# EAGLE board mega_classboard2.1 (EAGLE 6.5.0)
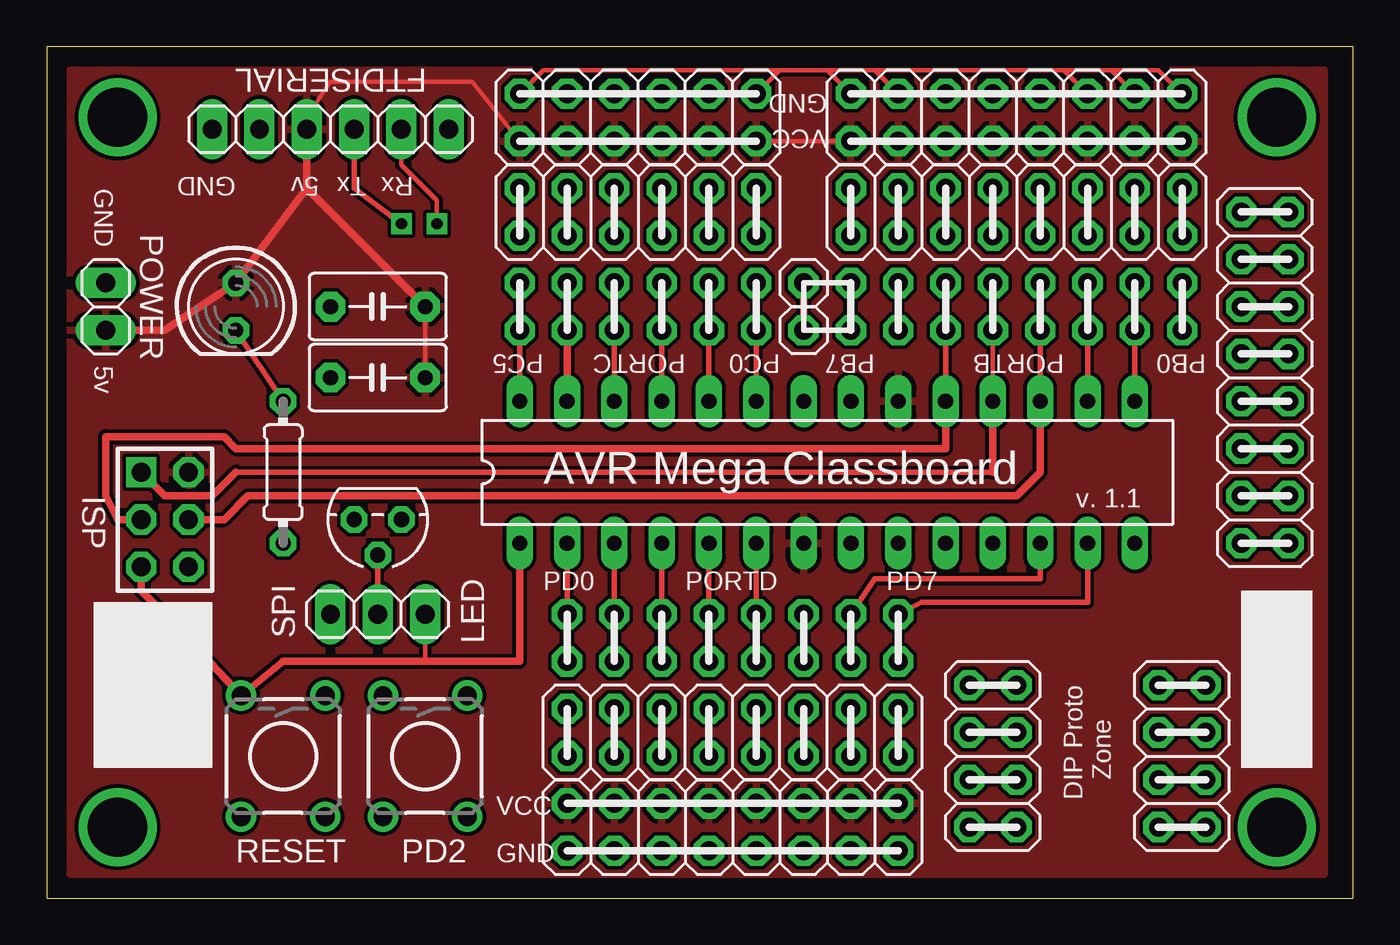
[diagram p0: board, top side]
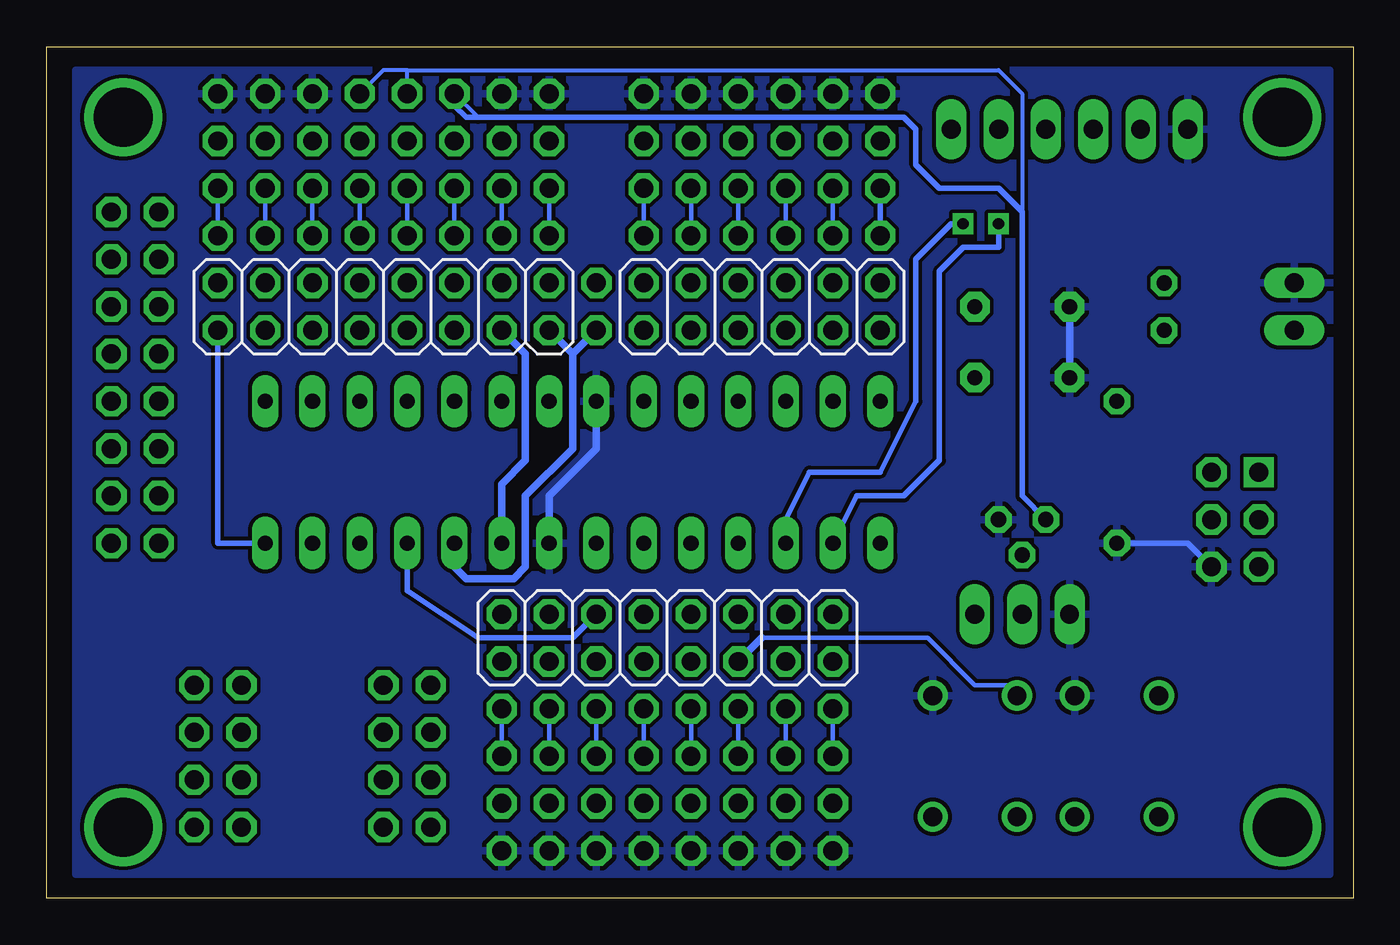
[diagram p1: board, bottom side, seen from below]

Size 70.16 x 45.71 mm. Coordinates in mm from the lower left corner, seen from the top.
Outline: 0,0 70.16,0 70.16,45.71 0,45.71 0,0
Copper layers (1*16): Top 0.035mm / dielectric 1.5mm / Bottom 0.035mm
Design rules "SparkFun": minimum track width 8mil, minimum drill 20mil, track to track 8mil, track to pad 8mil, pad to pad 8mil, via to via 8mil, smd to smd 8mil, copper to edge 10mil, drill to drill 8mil, minimum pad ring 12mil, minimum via ring 10mil, stop-mask expansion 4mil, vias tented up to drill 25mil, thermal gap 10mil

## Footprints (pad centres in the part's own frame; a part is rotated, then mirrored left to right if it is on the bottom)
TACTILE-PTH = drill 1.016: 1 -3.251,2.261; 2 3.251,2.261; 3 -3.251,-2.261; 4 3.251,-2.261
C5B3.5 = drill 0.813 pad 1.6 octagon: 1 -2.54,0; 2 2.54,0
1X06 = drill 1.016 long: 1 -6.35,0; 2 -3.81,0; 3 -1.27,0; 4 1.27,0; 5 3.81,0; 6 6.35,0
PAD_0.1250 = drill 3.175 pad 3.175: 1 0,0
DIL28-3 = drill 0.813 long: 1 -16.51,-3.81; 2 -13.97,-3.81; 3 -11.43,-3.81; 4 -8.89,-3.81; 5 -6.35,-3.81; 6 -3.81,-3.81; 7 -1.27,-3.81; 8 1.27,-3.81; 9 3.81,-3.81; 10 6.35,-3.81; 11 8.89,-3.81; 12 11.43,-3.81; 13 13.97,-3.81; 14 16.51,-3.81; 15 16.51,3.81; 16 13.97,3.81; 17 11.43,3.81; 18 8.89,3.81; 19 6.35,3.81; 20 3.81,3.81; 21 1.27,3.81; 22 -1.27,3.81; 23 -3.81,3.81; 24 -6.35,3.81; 25 -8.89,3.81; 26 -11.43,3.81; 27 -13.97,3.81; 28 -16.51,3.81
AVR-ISP-6 = drill 1.016 square: 1 -2.54,-1.27 | drill 1.016 octagon: 2 -2.54,1.27; 3 0,-1.27; 4 0,1.27; 5 2.54,-1.27; 6 2.54,1.27
2X04 = drill 1.016 octagon: 1 -3.81,-1.27; 2 -3.81,1.27; 3 -1.27,-1.27; 4 -1.27,1.27; 5 1.27,-1.27; 6 1.27,1.27; 7 3.81,-1.27; 8 3.81,1.27
2X08 = drill 1.016 octagon: 1 -8.89,-1.27; 2 -8.89,1.27; 3 -6.35,-1.27; 4 -6.35,1.27; 5 -3.81,-1.27; 6 -3.81,1.27; 7 -1.27,-1.27; 8 -1.27,1.27; 9 1.27,-1.27; 10 1.27,1.27; 11 3.81,-1.27; 12 3.81,1.27; 13 6.35,-1.27; 14 6.35,1.27; 15 8.89,-1.27; 16 8.89,1.27
2X06 = drill 1.016 octagon: 1 -6.35,-1.27; 2 -6.35,1.27; 3 -3.81,-1.27; 4 -3.81,1.27; 5 -1.27,-1.27; 6 -1.27,1.27; 7 1.27,-1.27; 8 1.27,1.27; 9 3.81,-1.27; 10 3.81,1.27; 11 6.35,-1.27; 12 6.35,1.27
1X01 = drill 1.016 octagon: 1 0,0
1X02 = drill 1.016 long: 1 -1.27,0; 2 1.27,0
LED5MM = drill 0.813 octagon: A -1.27,0; K 1.27,0
TO-92 = drill 0.813 octagon: 1 -1.27,0; 2 0,1.905; 3 1.27,0
0204/7 = drill 0.813 octagon: 1 -3.81,0; 2 3.81,0
1X03 = drill 1.016 long: 1 -2.54,0; 2 0,0; 3 2.54,0

## Placement (x,y rotation side)
A  SWITCH-MOMENTARY-2PTH  [TACTILE-PTH]  12.7,7.62 270 top
B  SWITCH-MOMENTARY-2PTH  [TACTILE-PTH]  20.32,7.62 270 top
BUFFER  1u  [C5B3.5]  17.78,27.94 180 top
BUFFER1  0.1u  [C5B3.5]  17.78,31.75 180 top
FTDISERIAL  [1X06]  15.24,41.27 0 top
H1  SPECIAL_DRILL_0.1250  [PAD_0.1250]  3.81,41.91 0 top
H2  SPECIAL_DRILL_0.1250  [PAD_0.1250]  3.81,3.81 0 top
H3  SPECIAL_DRILL_0.1250  [PAD_0.1250]  66.04,41.91 0 top
H4  SPECIAL_DRILL_0.1250  [PAD_0.1250]  66.04,3.81 0 top
IC1  MEGA8-P  [DIL28-3]  41.91,22.86 0 top
ISP  AVR-ISP-6  [AVR-ISP-6]  6.35,20.32 270 top
JP1  [2X04]  50.8,7.62 90 top
JP2  [2X04]  60.96,7.62 90 top
JP3  [2X08]  52.07,36.83 0 top
JP4  [2X08]  36.83,8.89 180 top
JP5  [2X08]  65.41,27.94 90 top
JP6  [2X06]  31.75,36.83 0 top
JP8  [2X08]  52.07,41.91 180 top
JP9  [2X08]  36.83,3.81 0 top
JP10  [2X06]  31.75,41.91 180 top
JP11  [1X01]  40.64,30.48 0 top
JP12  [1X01]  40.64,33.02 0 top
PORTB  [2X08]  52.07,31.75 0 bottom
PORTC  [2X06]  31.75,31.75 0 bottom
PORTD  [2X08]  36.83,13.97 180 bottom
POWER  [1X02]  3.18,31.75 90 top
POWERLED  [LED5MM]  10.16,31.75 270 top
Q1  2N7000  [TO-92]  17.78,20.32 180 top
R1  200  [0204/7]  12.7,22.86 90 top
SWITCHABLEGND  [1X03]  17.78,15.24 180 top

## Library data of the parts
A B = SparkFun
BUFFER BUFFER1 = capacitor-wima
FTDISERIAL JP1-JP6 JP8-JP12 PORTB PORTC PORTD POWER SWITCHABLEGND = pinhead
H1-H4 = special-drill
IC1 = atmel; OC_FARNELL: unknown; OC_NEWARK: unknown
ISP = atmel-1
POWERLED = led
Q1 = transistors
R1 = rcl

## Nets
GND: A.1 B.1 BUFFER1.2 BUFFER.2 FTDISERIAL.1 IC1.8 IC1.22 ISP.6 JP8.1 JP8.3 JP8.5 JP8.13 JP8.15 JP9.1 JP9.3 JP9.5 JP9.7 JP9.9 JP9.11 JP9.13 JP9.15 JP10.1 JP10.3 JP10.5 JP10.7 JP10.9 JP10.11 POWER.2 Q1.1 R1.1 SWITCHABLEGND.3
N$1: POWERLED.K R1.2
N$2: Q1.2 SWITCHABLEGND.2
N$3: JP6.11 JP6.12
N$4: JP6.9 JP6.10
N$5: JP6.7 JP6.8
N$6: JP6.5 JP6.6
N$7: JP6.3 JP6.4
N$8: JP6.1 JP6.2
N$9: JP3.15 JP3.16
N$10: JP3.13 JP3.14
N$11: JP3.11 JP3.12
N$12: JP3.9 JP3.10
N$13: JP3.7 JP3.8
N$14: JP3.5 JP3.6
N$15: JP3.3 JP3.4
N$16: JP3.1 JP3.2
N$17: JP4.15 JP4.16
N$18: JP4.13 JP4.14
N$19: JP4.11 JP4.12
N$20: JP4.9 JP4.10
N$21: JP4.7 JP4.8
N$22: JP4.5 JP4.6
N$23: JP4.3 JP4.4
N$24: JP4.1 JP4.2
N$25: JP1.1 JP1.2
N$26: JP1.3 JP1.4
N$27: JP1.5 JP1.6
N$28: JP1.7 JP1.8
N$29: JP2.1 JP2.2
N$30: JP2.3 JP2.4
N$31: JP2.5 JP2.6
N$32: JP2.7 JP2.8
N$33: JP5.1 JP5.2
N$34: JP5.3 JP5.4
N$35: JP5.5 JP5.6
N$36: JP5.7 JP5.8
N$37: JP5.9 JP5.10
N$38: JP5.11 JP5.12
N$39: JP5.13 JP5.14
N$40: JP5.15 JP5.16
N$41: JP8.7 JP8.9 JP8.11 Q1.3
N$46: A.3 IC1.1 ISP.5 SWITCHABLEGND.1
PORTB0: IC1.14 PORTB.1 PORTB.2
PORTB1: IC1.15 PORTB.3 PORTB.4
PORTB2: IC1.16 PORTB.5 PORTB.6
PORTB3: IC1.17 ISP.4 PORTB.7 PORTB.8
PORTB4: IC1.18 ISP.1 PORTB.9 PORTB.10
PORTB5: IC1.19 ISP.3 PORTB.11 PORTB.12
PORTB6: IC1.9 PORTB.13 PORTB.14
PORTB7: IC1.10 JP11.1 JP12.1 PORTB.15 PORTB.16
PORTC0: IC1.23 PORTC.1 PORTC.2
PORTC1: IC1.24 PORTC.3 PORTC.4
PORTC2: IC1.25 PORTC.5 PORTC.6
PORTC3: IC1.26 PORTC.7 PORTC.8
PORTC4: IC1.27 PORTC.9 PORTC.10
PORTC5: IC1.28 PORTC.11 PORTC.12
PORTD0: FTDISERIAL.4 IC1.2 PORTD.1 PORTD.2
PORTD1: FTDISERIAL.5 IC1.3 PORTD.3 PORTD.4
PORTD2: B.3 IC1.4 PORTD.5 PORTD.6
PORTD3: IC1.5 PORTD.7 PORTD.8
PORTD4: IC1.6 PORTD.9 PORTD.10
PORTD5: IC1.11 PORTD.11 PORTD.12
PORTD6: IC1.12 PORTD.13 PORTD.14
PORTD7: IC1.13 PORTD.15 PORTD.16
VCC: BUFFER1.1 BUFFER.1 FTDISERIAL.3 IC1.7 IC1.20 ISP.2 JP8.2 JP8.4 JP8.6 JP8.8 JP8.10 JP8.12 JP8.14 JP8.16 JP9.2 JP9.4 JP9.6 JP9.8 JP9.10 JP9.12 JP9.14 JP9.16 JP10.2 JP10.4 JP10.6 JP10.8 JP10.10 JP10.12 POWER.1 POWERLED.A

## Tracks (layer width: path | path; a pad name or v marks a point on that pad's centre or on a via)
GND
  Top 0.254: JP10.3 JP10.5 JP10.7 JP10.9 JP10.11 26.67,44.45 39.37,44.45 | 39.37,44.45 JP10.1 | 39.37,44.45 41.91,44.45 | 41.91,44.45 JP8.15 | 44.45,44.45 JP8.13 | 41.91,44.45 44.45,44.45 | 54.61,44.45 JP8.5 | 44.45,44.45 54.61,44.45 | 57.15,44.45 JP8.3 | 54.61,44.45 57.15,44.45 | JP8.1 59.69,44.45 57.15,44.45
  Bottom 0.305: ISP.6 8.89,19.05 R1.1
  Bottom 0.406: IC1.8 43.18,21.59 40.64,24.13 IC1.22 | BUFFER.2 BUFFER1.2
  pour Bottom: 1.27,1.27 68.58,1.27 68.58,44.45 13.97,44.45 1.27,44.45
N$1
  Top 0.305: R1.2 POWERLED.K
N$2
  Top 0.305: SWITCHABLEGND.2 Q1.2
N$3
  Bottom 0.254: JP6.11 JP6.12
N$4
  Bottom 0.254: JP6.9 JP6.10
N$5
  Bottom 0.254: JP6.7 JP6.8
N$6
  Bottom 0.254: JP6.5 JP6.6
N$7
  Bottom 0.254: JP6.3 JP6.4
N$8
  Bottom 0.305: JP6.1 JP6.2
N$9
  Bottom 0.254: JP3.15 JP3.16
N$10
  Bottom 0.254: JP3.13 JP3.14
N$11
  Bottom 0.254: JP3.11 JP3.12
N$12
  Bottom 0.254: JP3.9 JP3.10
N$13
  Bottom 0.254: JP3.7 JP3.8
N$14
  Bottom 0.254: JP3.5 JP3.6
N$15
  Bottom 0.254: JP3.3 JP3.4
N$16
  Bottom 0.254: JP3.1 JP3.2
N$17
  Bottom 0.254: JP4.16 JP4.15
N$18
  Bottom 0.254: JP4.14 JP4.13
N$19
  Bottom 0.254: JP4.12 JP4.11
N$20
  Bottom 0.254: JP4.10 JP4.9
N$21
  Bottom 0.254: JP4.8 JP4.7
N$22
  Bottom 0.254: JP4.6 JP4.5
N$23
  Bottom 0.254: JP4.4 JP4.3
N$24
  Bottom 0.254: JP4.2 JP4.1
N$25
  Top 0.305: JP1.2 JP1.1
N$26
  Top 0.305: JP1.4 JP1.3
N$27
  Top 0.305: JP1.6 JP1.5
N$28
  Top 0.305: JP1.8 JP1.7
N$29
  Top 0.305: JP2.2 JP2.1
N$30
  Top 0.305: JP2.4 JP2.3
N$31
  Top 0.305: JP2.6 JP2.5
N$32
  Top 0.305: JP2.8 JP2.7
N$33
  Top 0.406: JP5.2 JP5.1
N$34
  Top 0.406: JP5.4 JP5.3
N$35
  Top 0.406: JP5.6 JP5.5
N$36
  Top 0.406: JP5.8 JP5.7
N$37
  Top 0.406: JP5.10 JP5.9
N$38
  Top 0.406: JP5.12 JP5.11
N$39
  Top 0.406: JP5.14 JP5.13
N$40
  Top 0.406: JP5.16 JP5.15
N$41
  Bottom 0.203: 46.99,41.91 JP8.11 | 17.78,36.83 17.78,43.18 19.05,44.45 50.8,44.45 | JP8.9 50.8,44.45 | JP8.7 52.07,44.45 50.8,44.45
  Bottom 0.305: 48.26,42.54 47.62,41.91 46.99,41.91 24.13,41.91 23.49,41.27 23.49,39.37 22.23,38.1 19.05,38.1 17.78,36.83 17.78,21.59 Q1.3
N$46
  Top 0.254: SWITCHABLEGND.1 20.32,12.7
  Top 0.406: ISP.5 5.08,16.51 6.35,15.24 A.3 12.7,12.7 20.32,12.7 25.4,12.7 IC1.1
PORTB0
  Top 0.254: PORTB.1 PORTB.2
  Bottom 0.305: IC1.14 60.96,19.05 PORTB.1
PORTB1
  Top 0.305: IC1.15 PORTB.3 PORTB.4
PORTB2
  Top 0.254: PORTB.5 PORTB.6
  Top 0.305: IC1.16 PORTB.5
PORTB3
  Top 0.254: PORTB.7 PORTB.8
  Top 0.305: IC1.17 PORTB.7
  Top 0.406: ISP.4 9.52,20.32 10.8,21.59 52.07,21.59 53.34,22.86 IC1.17
PORTB4
  Top 0.254: IC1.18 PORTB.9 PORTB.10
  Top 0.305: 10.16,22.86 50.8,22.86
  Top 0.406: 50.8,22.86 IC1.18 | 10.16,22.86 8.89,21.59 6.35,21.59 ISP.1
PORTB5
  Top 0.254: PORTB.11 PORTB.12
  Top 0.305: IC1.19 PORTB.11
  Top 0.406: ISP.3 3.81,20.32 3.18,21.59 3.18,24.77 9.52,24.77 10.16,24.13 48.26,24.13 IC1.19
PORTB6
  Top 0.254: PORTB.13 PORTB.14
  Bottom 0.406: PORTB.13 44.45,29.21 44.45,23.49 45.72,22.23 IC1.9
PORTB7
  Top 0.406: PORTB.15 PORTB.16 | JP11.1 JP12.1
  Bottom 0.406: 41.91,29.21 PORTB.15 | 41.91,29.21 41.91,24.13 44.45,21.59 44.45,17.78 45.09,17.14 47.62,17.14 48.26,17.78 IC1.10 | 41.91,29.21 JP11.1
PORTC0
  Top 0.254: PORTC.1 PORTC.2
  Top 0.305: IC1.23 PORTC.1
PORTC1
  Top 0.254: PORTC.3 PORTC.4
  Top 0.305: IC1.24 PORTC.3
PORTC2
  Top 0.254: PORTC.5 PORTC.6
  Top 0.305: IC1.25 PORTC.5
PORTC3
  Top 0.254: PORTC.7 PORTC.8
  Top 0.305: IC1.26 PORTC.7
PORTC4
  Top 0.254: PORTC.9 PORTC.10
  Top 0.406: IC1.27 PORTC.9
PORTC5
  Top 0.305: IC1.28 PORTC.11 PORTC.12
PORTD0  (via drill 0.6)
  Top 0.305: PORTD.1 IC1.2 | v19.05,36.2 16.51,38.1 FTDISERIAL.4
  Top 0.406: PORTD.2 PORTD.1
  Bottom 0.305: IC1.2 26.67,21.59 24.13,21.59 22.23,23.49 22.23,33.66 20.95,34.92 19.05,34.92 v19.05,36.2
PORTD1  (via drill 0.6)
  Top 0.254: v20.95,36.2 20.95,37.46 19.05,39.37 FTDISERIAL.5
  Top 0.305: PORTD.3 IC1.3
  Top 0.406: PORTD.4 PORTD.3
  Bottom 0.305: IC1.3 30.48,20.32 29.21,22.86 25.4,22.86 23.49,26.67 23.49,34.29 21.59,36.2 v20.95,36.2
PORTD2
  Top 0.305: PORTD.5 IC1.4
  Top 0.406: PORTD.6 PORTD.5
  Bottom 0.254: 31.75,13.97 22.86,13.97 20.32,11.43 18.62,11.43 B.3
  Bottom 0.406: 31.75,13.97 PORTD.6
PORTD3
  Top 0.254: PORTD.8 PORTD.7
  Top 0.305: PORTD.7 IC1.5
PORTD4
  Top 0.254: PORTD.10 PORTD.9
  Top 0.305: PORTD.9 IC1.6
PORTD5
  Top 0.406: PORTD.12 PORTD.11
  Bottom 0.305: IC1.11 50.8,16.51 46.99,13.97 41.91,13.97 PORTD.11
PORTD6
  Top 0.254: PORTD.14 PORTD.13
  Top 0.305: IC1.12 53.34,17.14 44.45,17.14 PORTD.13
PORTD7
  Top 0.254: PORTD.16 PORTD.15
  Top 0.305: IC1.13 55.88,15.87 46.99,15.87 PORTD.15
VCC
  Top 0.254: BUFFER1.1 BUFFER.1 | JP8.4 JP8.6 JP8.8 JP8.10 JP8.12 JP8.14 JP8.16 JP10.2 JP10.4 JP10.6 JP10.8 JP10.10 JP10.12 22.86,43.81 15.24,43.81 13.97,41.91 FTDISERIAL.3
  Top 0.406: 13.97,38.1 FTDISERIAL.3 | 13.97,38.1 BUFFER1.1 | 13.97,38.1 POWERLED.A 6.35,30.48 POWER.1
  pour Top: 1.27,1.27 68.58,1.27 68.58,44.45 1.27,44.45

## Text on the board
tNames: GND | VCC | GND | 5v | Tx | Rx | GND | 5v | PC5 | PC0 | PB7 | PB0 | AVR Mega Classboard | v. 1.1 | LED | PD0 | PD7 | SPI | DIP Proto | Zone | VCC | RESET | PD2 | GND